# Altium PCB ESP32-C3_ETH01.PcbDoc (part 2 of 2)
Units mm, origin at the board's own origin, x right, y up, seen from the top; angles counter-clockwise.
Board outline 55 x 26 mm, 2 copper layers (Top Layer, Bottom Layer); 54 components, 52 nets, 217 pads, 131 vias.
Unrouted connection lines stored in the file: 1.
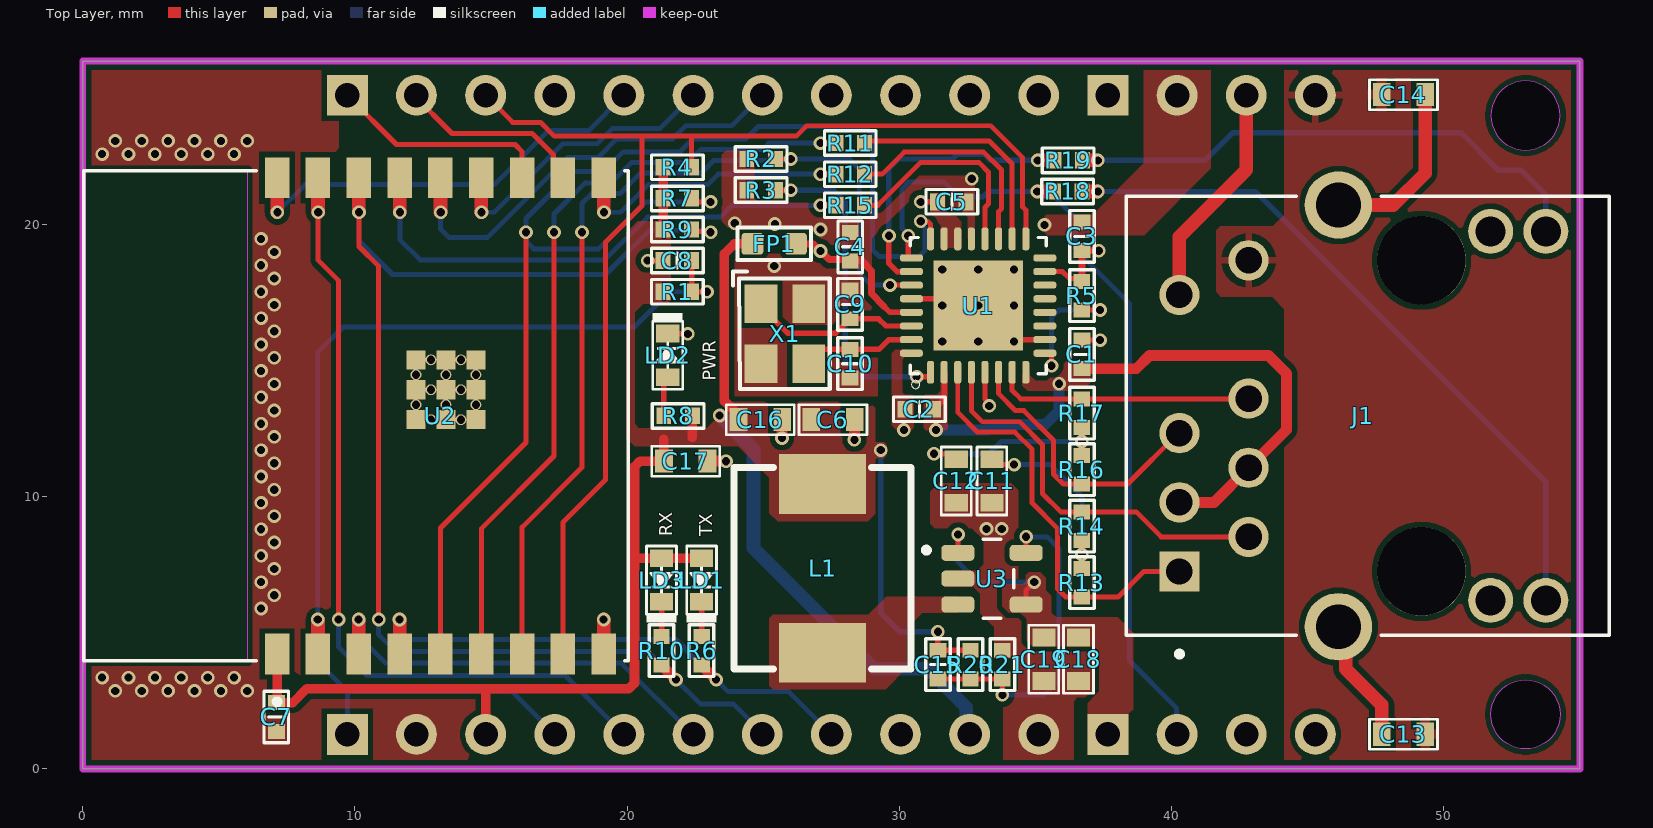
[diagram p0: Top Layer view]

## Polygon pours and split planes (outlines as drawn) (continued)
GND on Bottom Layer "NONET_L01_P-001" (solid, pour order 27): 41.554,26 41.554,22.962 32.08,22.962 32.08,20.803 41.504,20.803 41.504,0 29.926,0 29.926,26
GND on Bottom Layer "NONET_L01_P-001" (solid, pour order 23): 18.566,26 0,26 0,21.965 6.042,21.965 6.042,3.965 0.295,3.965 0.295,0 30.998,0 30.998,21.229 18.576,21.229 18.576,26
ETH_PWR on Bottom Layer "NONET_L01_P-001" (solid, pour order 20): 35.077,22.581 32.156,22.581 32.156,20.599 36.728,20.599 36.728,22.581
ETH_PWR on Bottom Layer "NONET_L01_P-001" (solid, pour order 16): 55,26 44.114,26 44.114,22.581 36.373,22.581 36.373,18.593 41.504,18.593 41.504,0 55,0

## Keep-outs
Keep-Out Layer:
  the board outline again, w0.254

## Silkscreen, mask and mechanical layers (free items; w line width, h text height)
Top Overlay:
  text "PWR" at 23.428,14.254 h0.8 r90
  text "RX" at 21.814,8.54 h0.8 r90
  text "TX" at 23.284,8.54 h0.8 r90
Bottom Overlay:
  text "POE+" at 42.899,22.93 h2 r90
  text "POE-" at 44.996,22.93 h2 r90
  text "TX0" at 10.281,22.837 h2 r90
  text "RX0" at 12.746,22.837 h2 r90
  text "IO9" at 15.247,22.837 h2 r90
  text "GND" at 17.747,22.837 h2 r90
  text "IO0" at 20.375,22.837 h2 r90
  text "IO19" at 23.076,22.837 h2 r90
  text "IO19" at 25.734,22.837 h2 r90
  text "NC" at 28.392,22.837 h2 r90
  text "NC" at 30.892,22.837 h2 r90
  text "NC" at 33.392,22.837 h2 r90
  text "NC" at 35.893,22.837 h2 r90
  text "NC" at 38.393,22.837 h2 r90
  text "GND" at 40.875,22.837 h2 r90
  text "IO4/485_EN" at 23.076,11.029 h2 r90
  text "IO1/CFG" at 20.375,8.648 h2 r90
  text "IO5/RX" at 25.734,7.905 h2 r90
  text "IO2/TX" at 28.392,7.805 h2 r90
  text "LINK" at 40.84,6.224 h2 r90
  text "GND" at 12.746,6.174 h2 r90
  text "GND" at 30.892,6.174 h2 r90
  text "GND" at 35.893,6.174 h2 r90
  text "3V3" at 15.247,5.456 h2 r90
  text "3V3" at 33.392,5.456 h2 r90
  text "NC" at 43.025,4.9 h2 r90
  text "NC" at 44.913,4.9 h2 r90
  text "EN" at 10.246,4.663 h2 r90
  text "EN" at 17.712,4.663 h2 r90
  text "5V" at 38.375,4.674 h2 r90
Mechanical 15:
  circle w0.254: c53,2 r1.27
  circle w0.254: c53,24 r1.27
  lines w0.1: 29.643,17.018 36.143,17.018 ; 33.143,13.768 33.143,20.268
  lines w0.254: -2.286,12.965 66.04,12.965 ; 27.5,-5.207 27.5,29.337 ; 0,0 60,0 60,26 0,26 0,0